# EAGLE board IOIO Pump Sensors (EAGLE 6.3)
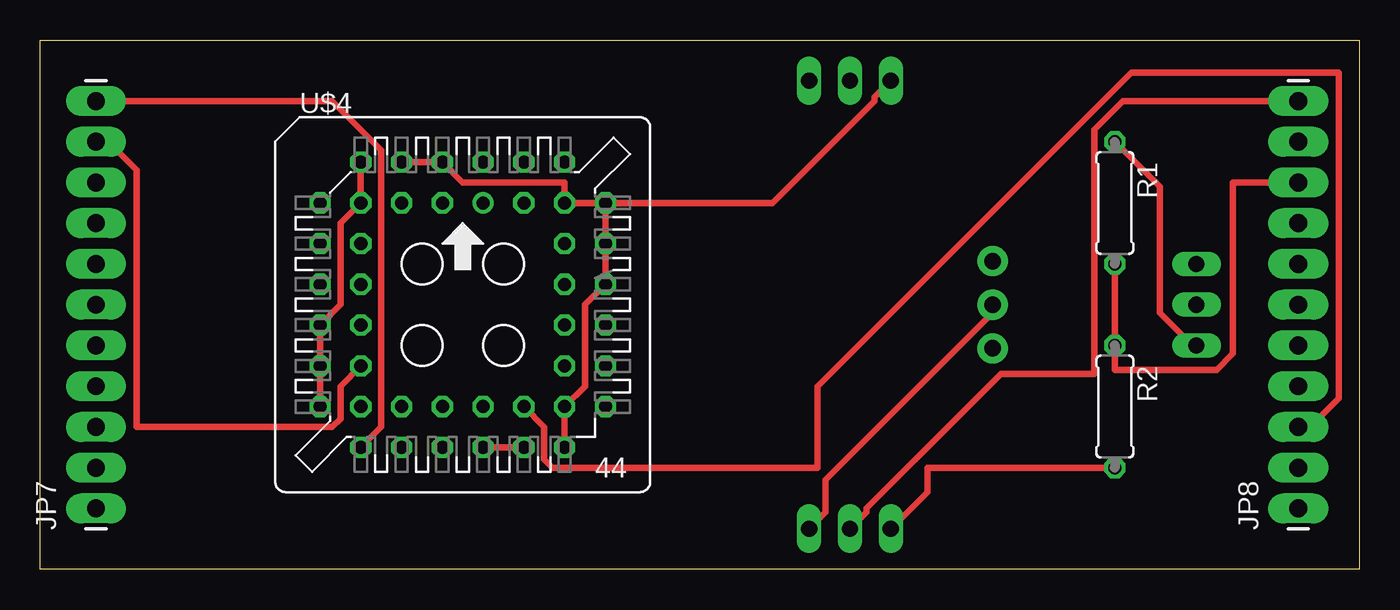
[diagram p0: board, top side]
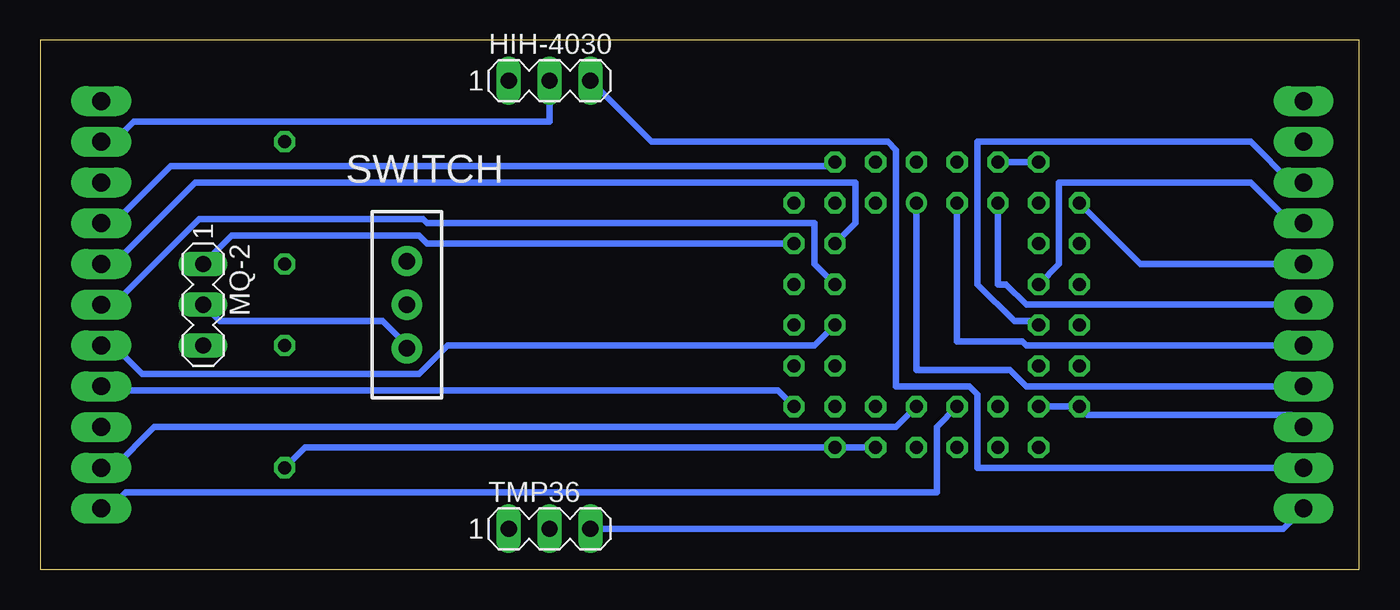
[diagram p1: board, bottom side, seen from below]

Size 82.22 x 33.01 mm. Coordinates in mm from the lower left corner, seen from the top.
Outline: 82.22,0 0,0 0,33.01 82.22,33.01 82.22,0
Copper layers (1*16): Top 0.035mm / dielectric 1.5mm / Bottom 0.035mm
Design rules "default *": minimum track width 16mil, minimum drill 24mil, track to track 16mil, track to pad 16mil, pad to pad 16mil, via to via 16mil, smd to smd 8mil, copper to edge 40mil, drill to drill 8mil, minimum pad ring 10mil, minimum via ring 8mil, stop-mask expansion 4mil, vias tented up to drill 0mil, thermal gap 10mil

## Footprints (pad centres in the part's own frame; a part is rotated, then mirrored left to right if it is on the bottom)
MA03-1 = drill 1.016 long: 1 -2.54,0; 2 0,0; 3 2.54,0
1X11_LONGPADS = drill 1.118 pad 1.88 long: 1 0,0; 2 2.54,0; 3 5.08,0; 4 7.62,0; 5 10.16,0; 6 12.7,0; 7 15.24,0; 8 17.78,0; 9 20.32,0; 10 22.86,0; 11 25.4,0
0207/7 = drill 0.813 octagon: 1 -3.81,0; 2 3.81,0
SWITCH-SPDT_LOCK.007S = drill 1.016 pad 1.88: 1 0,2.718; 2 0,0; 3 0,-2.718
S44 = drill 0.813: 1 1.27,6.35 | drill 0.813 octagon: 2 -1.27,8.89; 3 -1.27,6.35; 4 -3.81,8.89; 5 -3.81,6.35; 6 -6.35,8.89; 7 -8.89,6.35; 8 -6.35,6.35; 9 -8.89,3.81; 10 -6.35,3.81; 11 -8.89,1.27; 12 -6.35,1.27; 13 -8.89,-1.27; 14 -6.35,-1.27; 15 -8.89,-3.81; 16 -6.35,-3.81; 17 -8.89,-6.35; 18 -6.35,-8.89; 19 -6.35,-6.35; 20 -3.81,-8.89; 21 -3.81,-6.35; 22 -1.27,-8.89; 23 -1.27,-6.35; 24 1.27,-8.89; 25 1.27,-6.35; 26 3.81,-8.89; 27 3.81,-6.35; 28 6.35,-8.89; 29 8.89,-6.35; 30 6.35,-6.35; 31 8.89,-3.81; 32 6.35,-3.81; 33 8.89,-1.27; 34 6.35,-1.27; 35 8.89,1.27; 36 6.35,1.27; 37 8.89,3.81; 38 6.35,3.81; 39 8.89,6.35; 40 6.35,8.89; 41 6.35,6.35; 42 3.81,8.89; 43 3.81,6.35; 44 1.27,8.89

## Placement (x,y rotation side)
HIH-4030  [MA03-1]  50.47,30.48 0 bottom
JP7  M11LONGPADS  [1X11_LONGPADS]  3.48,3.81 90 top
JP8  M11LONGPADS  [1X11_LONGPADS]  78.41,3.81 90 top
MQ-2  [MA03-1]  72.06,16.51 270 bottom
R1  10k  [0207/7]  66.98,22.86 270 top
R2  10k  [0207/7]  66.98,10.16 270 top
SWITCH  [SWITCH-SPDT_LOCK.007S]  59.36,16.51 0 bottom
TMP36  [MA03-1]  50.47,2.54 0 bottom
U$4  [S44]  26.34,16.51 0 top

## Library data of the parts
HIH-4030 MQ-2 TMP36 = con-lstb; OC_FARNELL: unknown; OC_NEWARK: unknown
JP7 JP8 SWITCH = SparkFun
R1 R2 = resistor
U$4 = plcc-socket

## Nets
3.3V: HIH-4030.3 JP7.2
5V: JP7.1 SWITCH.2 TMP36.3
GND: HIH-4030.1 JP7.3 MQ-2.1 R2.2 TMP36.1 U$4.2 U$4.4 U$4.6 U$4.8 U$4.13 U$4.15 U$4.17 U$4.19 U$4.24 U$4.26 U$4.28 U$4.30 U$4.35 U$4.37 U$4.39 U$4.41
MQ2OUT: MQ-2.3 R1.1
MUX1: JP7.4 U$4.1
MUX2: JP7.5 U$4.3
MUX3: JP7.6 U$4.5
MUX4: JP7.7 U$4.7
MUX5: JP7.8 U$4.12
MUX6: JP7.9 U$4.14
MUX7: JP7.10 U$4.16
MUX8: JP7.11 U$4.18
MUX9: JP8.1 U$4.23
MUX10: JP8.2 U$4.25
MUX11: JP8.3 U$4.27
MUX12: JP8.4 U$4.29
MUX13: JP8.5 U$4.34
MUX14: JP8.6 U$4.36
MUX15: JP8.7 U$4.38
MUX16: JP8.8 U$4.40
PIN32: JP8.9 R1.2 R2.1
PIN33: HIH-4030.2 JP8.10
PIN34: JP8.11 TMP36.2
SWITCHOFF: SWITCH.1
SWITCHON: MQ-2.2 SWITCH.3

## Tracks (layer width: path | path; a pad name or v marks a point on that pad's centre or on a via)
3.3V
  Bottom 0.406: HIH-4030.3 44.12,26.67 29.39,26.67 28.88,26.16 28.88,11.43 24.31,11.43 23.8,10.92 23.8,6.35 JP7.2
5V
  Top 0.406: TMP36.3 48.95,3.56 48.95,5.59 59.36,16 SWITCH.2
  Bottom 0.406: JP7.1 4.75,2.54 TMP36.3
GND
  Top 0.406: U$4.6 U$4.8 18.72,21.59 18.72,16.51 U$4.13 U$4.15 U$4.17 | U$4.4 U$4.2 26.34,24.13 32.69,24.13 U$4.41 U$4.39 | HIH-4030.1 51.99,29.46 51.99,29.21 45.64,22.86 U$4.39 | R2.2 55.3,6.35 55.3,4.83 TMP36.1 | U$4.26 U$4.24 | U$4.28 U$4.30 33.96,11.43 33.96,16.51 U$4.35 U$4.37 U$4.39
  Bottom 0.406: U$4.4 U$4.6 | U$4.19 U$4.17 16.94,9.65 4.24,9.65 JP7.3 | U$4.26 U$4.28 65.71,7.62 R2.2 | MQ-2.1 70.28,20.83 58.6,20.83 58.09,20.32 U$4.37
MQ2OUT
  Top 0.406: R1.1 69.77,23.88 69.77,16 71.81,13.97 MQ-2.3
MUX1
  Bottom 0.406: U$4.1 27.61,12.45 21.77,12.45 20.75,11.43 JP7.4
MUX2
  Bottom 0.406: U$4.3 25.07,14.22 21.01,14.22 20.75,13.97 JP7.5
MUX3
  Bottom 0.406: U$4.5 22.53,17.78 22.02,17.78 20.75,16.51 JP7.6
MUX4
  Bottom 0.406: U$4.7 13.64,19.05 JP7.7
MUX5
  Bottom 0.406: U$4.12 18.72,19.05 18.72,24.13 6.78,24.13 4.24,21.59 JP7.8
MUX6
  Bottom 0.406: U$4.14 20.24,15.49 21.51,15.49 23.8,17.78 23.8,26.67 6.78,26.67 4.24,24.13 JP7.9
MUX7
  Top 0.406: U$4.16 18.72,11.43 18.72,9.4 18.21,8.89 6.02,8.89 6.02,24.89 4.24,26.67 JP7.10
MUX8
  Top 0.406: U$4.18 21.26,8.89 21.26,26.16 18.21,29.21 JP7.11
MUX9
  Bottom 0.406: U$4.23 26.34,8.89 26.34,4.83 76.89,4.83 77.9,3.81 JP8.1
MUX10
  Bottom 0.406: U$4.25 28.88,8.89 75.11,8.89 77.65,6.35 JP8.2
MUX11
  Top 0.406: U$4.27 31.42,8.89 31.42,6.86 31.93,6.35 48.44,6.35 48.44,11.43 68,30.99 80.95,30.99 80.95,10.67 79.17,8.89 JP8.3
MUX12
  Bottom 0.406: U$4.29 36.25,11.18 78.16,11.18 JP8.4
MUX13
  Bottom 0.406: U$4.34 33.96,13.97 56.82,13.97 58.6,12.19 75.87,12.19 77.65,13.97 JP8.5
MUX14
  Bottom 0.406: U$4.36 33.96,19.05 33.96,21.59 58.09,21.59 58.34,21.84 72.31,21.84 77.65,16.51 JP8.6
MUX15
  Bottom 0.406: U$4.38 31.42,21.59 31.42,24.13 72.57,24.13 77.65,19.05 JP8.7
MUX16
  Bottom 0.406: U$4.40 32.94,25.15 74.09,25.15 77.65,21.59 JP8.8
PIN32
  Top 0.406: R1.2 R2.1 66.98,12.45 73.33,12.45 74.35,13.46 74.35,24.13 JP8.9
PIN33
  Bottom 0.406: HIH-4030.2 50.47,27.94 76.38,27.94 77.65,26.67 JP8.10
PIN34
  Top 0.406: TMP36.2 51.49,3.56 51.49,3.81 59.87,12.19 65.71,12.19 65.71,27.43 67.49,29.21 JP8.11
SWITCHON
  Bottom 0.406: MQ-2.2 71.04,15.49 60.88,15.49 59.36,13.97 SWITCH.3